# Altium PCB MainPCB.PcbDoc
Units mm, origin at the board's own origin, x right, y up, seen from the top; angles counter-clockwise.
Board outline 140 x 50 mm, 2 copper layers (Top Layer, Bottom Layer); 68 components, 119 nets, 474 pads, 62 vias.
Unrouted connection lines stored in the file: 121.
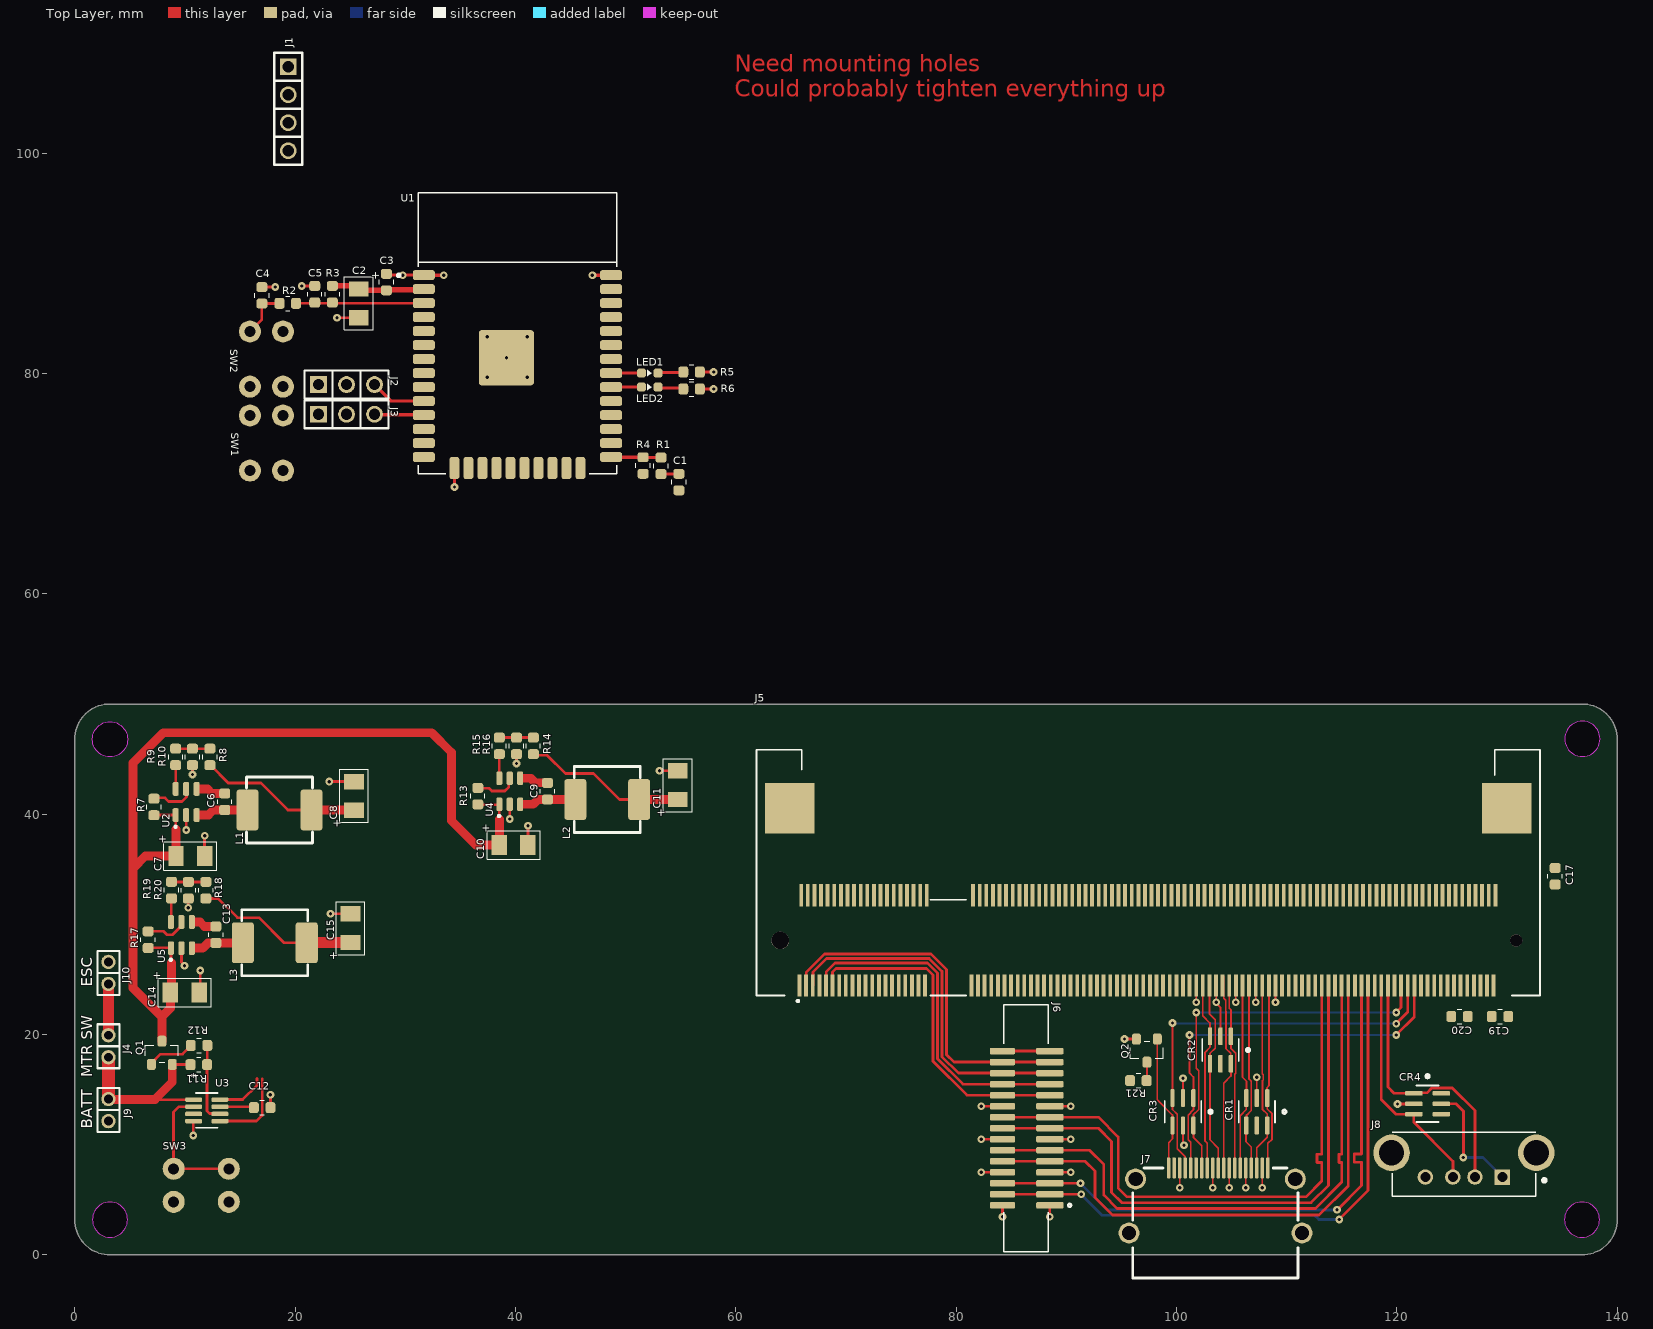
[diagram p0: Top Layer view]
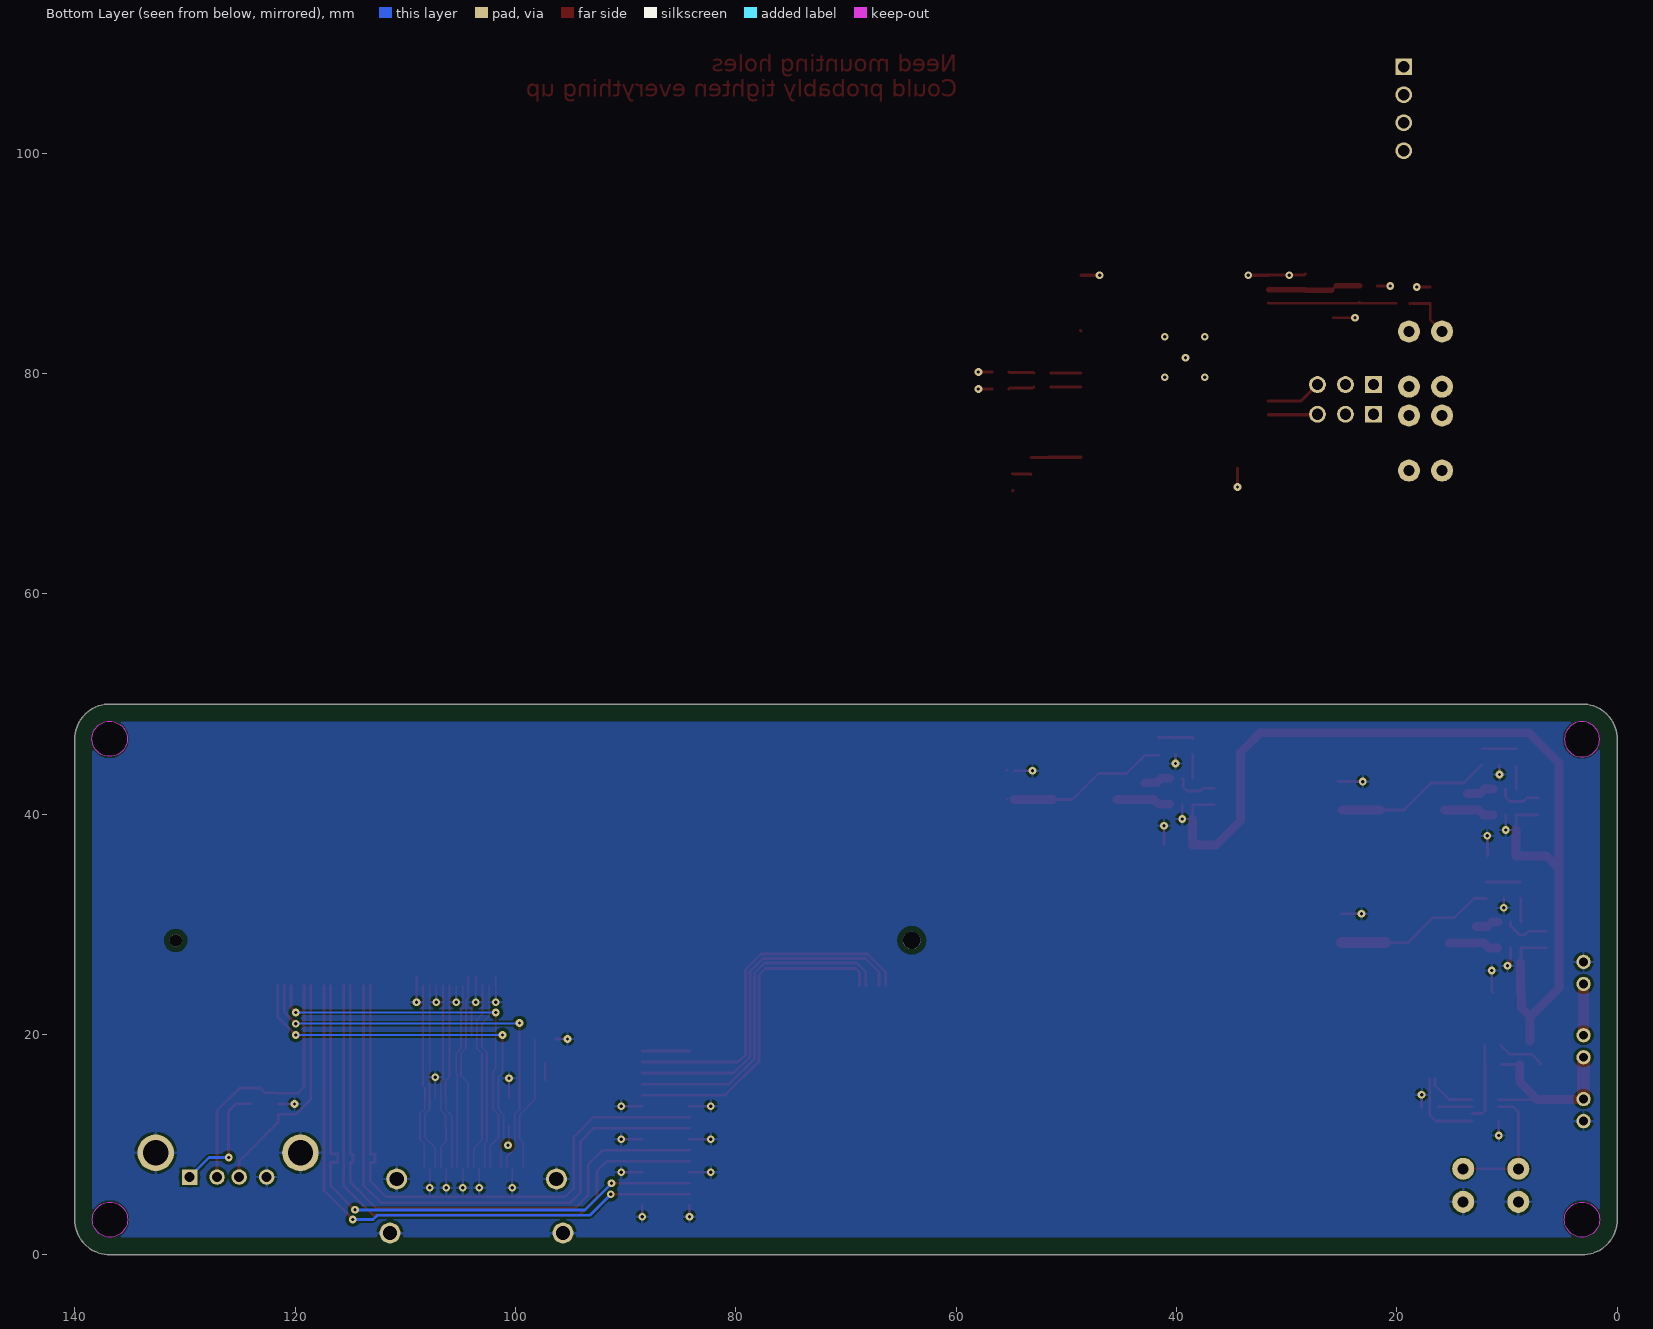
[diagram p1: Bottom Layer view, seen from below]

## Layer stack, top to bottom
Top Solder: solder mask 0.0102, Solder Resist, Dk 3.5
Top Layer: signal copper 0.0356
Dielectric 1: dielectric 0.32, FR-4, Dk 4.8
Bottom Layer: signal copper 0.0356
Bottom Solder: solder mask 0.0102, Solder Resist, Dk 3.5

## Board outline
0,3.2 0,46.8 cw(c3.2,46.8) 3.2,50 136.8,50 cw(c136.8,46.8) 140,46.8 140,3.2 cw(c136.8,3.2) 136.8,0 3.2,0 cw(c3.2,3.2)
cut-out: 135.2,3.2 ccw(c136.8,3.2) 136.8,1.6 ccw(c136.8,3.2) 138.4,3.2 ccw(c136.8,3.2) 136.8,4.8 ccw(c136.8,3.2)
cut-out: 135.241,46.842 ccw(c136.841,46.842) 136.841,45.242 ccw(c136.841,46.842) 138.441,46.842 ccw(c136.841,46.842) 136.841,48.442 ccw(c136.841,46.842)
cut-out: 3.2,45.2 cw(c3.2,46.8) 1.6,46.8 cw(c3.2,46.8) 3.2,48.4 cw(c3.2,46.8) 4.8,46.8 cw(c3.2,46.8)
cut-out: 1.6,3.2 ccw(c3.2,3.2) 3.2,1.6 ccw(c3.2,3.2) 4.8,3.2 ccw(c3.2,3.2) 3.2,4.8 ccw(c3.2,3.2)

## Design rules (kind name [scope] priority, off if disabled: settings)
Clearance [All] p1: gap=0.16 ignorepadtopadclearanceinfootprint=FALSE except(0.5: Arc-Hole Track-Hole SMDPad-Hole THPad-Hole Via-Hole Fill-Hole Poly-Hole Region-Hole Text-Hole)
DiffPairsRouting [All] p1: maxlimit=0.254 minlimit=0.254 mostfreqgap=0.254 toplayer_minwidth=0.381 toplayer_maxwidth=0.381 toplayer_prefwidth=0.381 bottomlayer_minwidth=0.381 bottomlayer_maxwidth=0.381 bottomlayer_prefwidth=0.381 maxuncoupledlength=12.7
MatchedLengths [InDifferentialPairClass('All Differential Pairs')] p1: tolerance=0.2 checknetsindiffpair=TRUE checkdiffpairvsdiffpair=FALSE checkxsignals=FALSE checkothers=FALSE
PlaneClearance [All] p1: clearance=0.5
PlaneConnect [All] p1: pad.planeconnectstyle=Relief pad.reliefexpansion=0.5 pad.reliefentries=4 pad.reliefconductorwidth=0.5 pad.reliefairgap=0.25 via.planeconnectstyle=Direct via.reliefexpansion=0.508 via.reliefentries=4 via.reliefconductorwidth=0.5 via.reliefairgap=0.254
PolygonConnect [All] p1: connectstyle=Relief reliefconductorwidth=0.254 reliefentries=4 polygonreliefangle="90 Angle" airgapwidth=0.254
RoutingVias [All] p1: holewidth=0.711 width=1.27 viastyle="Through Hole" minholewidth=0.711 minwidth=1.27 maxholewidth=0.711 maxwidth=1.27
SolderMaskExpansion [All] p1: expansion=0.102
Width [All] p1: maxlimit=0.5 minlimit=0.16 preferedwidth=0.25 minimp=50.000000 maximp=50.000000 favimp=50.000000
27 further rules are at their usual default settings.

## Classes and differential pairs
differential pair class DIFF: CAM1_C CAM1_D0 CAM1_D1
component class RaspberryPi: C17 C19 C20 CR1 CR2 CR3 CR4 J5 J6 J7 J8 Q2 R21
component class PowerSupply: C6 C7 C8 C9 C10 C11 C12 C13 C14 C15 J4 J9 J10 L1 L2 L3 Q1 R7 R8 R9 R10 R11 R12 R13 R14 R15 R16 R17 R18 R19 R20 SW3 U2 U3 U4 U5
component class ESP32: C1 C2 C3 C4 C5 J1 J2 J3 LED1 LED2 R1 R2 R3 R4 R5 R6 SW1 SW2 U1
differential pair CAM1_D1: +CAM1_D1_P -CAM1_D1_N
differential pair CAM1_D0: +CAM1_D0_P -CAM1_D0_N
differential pair CAM1_C: +CAM1_C_P -CAM1_C_N

## Components (designator, comment, footprint, x,y, rotation, side; value= is the part's Value field where it differs from the comment)
C1 "CAP" C0603 54.833,70.143 r90 top value=1nF
C2 "CAP-P" CASE-A 25.783,86.365 r270 top value=10uF
C3 "CAP" C0603 28.283,88.293 r90 top value=0.1uF
C4 "CAP" C0603 16.983,87.093 r270 top value=1nF
C5 "CAP" C0603 21.783,87.193 r90 top value=0.1uF
C6 "CAP" C0603 13.614,41.133 r270 top value=1uF
C7 "CAP-P" CASE-A 10.489,36.208 r0 top value=22uF
C8 "CAP-P" CASE-A 25.339,41.658 r90 top value=22uF
C9 "CAP" C0603 42.907,42.083 r270 top value=1uF
C10 "CAP-P" CASE-A 39.832,37.208 r0 top value=22uF
C11 "CAP-P" CASE-A 54.732,42.633 r90 top value=22uF
C12 "CAP" C0603 17.008,13.368 r0 top value=1uF
C13 "CAP" C0603 12.807,29.058 r270 top value=1uF
C14 "CAP-P" CASE-A 9.982,23.808 r0 top value=22uF
C15 "CAP-P" CASE-A 25.032,29.658 r90 top value=22uF
C17 "CAP" C0603 134.358,34.368 r90 top value=0.1uF
C19 "CAP" C0603 129.358,21.643 r0 top value=0.1uF
C20 "CAP" C0603 125.683,21.643 r180 top value=0.1uF
CR1 "HDMIULC6-4SC6" SOT23-6L 107.283,12.993 r270 top
CR2 "HDMIULC6-4SC6" SOT23-6L 103.983,18.593 r270 top
CR3 "HDMIULC6-4SC6" SOT23-6L 100.583,12.993 r270 top
CR4 "HDMIULC6-4SC6" SOT23-6L 122.783,13.718 r0 top
J1 "HDR_1x4" PINHEAD_2.54mm_1x4 19.382,107.84 r270 top
J2 "HDR_1x3" PINHEAD_2.54mm_1x3 22.13,78.993 r0 top
J3 "HDR_1x3" PINHEAD_2.54mm_1x3 22.13,76.293 r0 top
J4 "HDR_1x2" PINHEAD_2.00mm_1x2 3.058,19.943 r270 top
J5 "1473005-1" 1473005-1 97.433,28.543 r180 top
J6 "1-1734248-5" 1-1734248-5 86.3,11.5 r90 top
J7 "10029449-111RLF" 10029449-111RLF 103.533,6.893 r0 top
J8 "UJ2-AV-1-TH" UJ2-AV-1-TH 129.583,7.068 r180 top
J9 "HDR_1x2" PINHEAD_2.00mm_1x2 3.058,14.143 r270 top
J10 "HDR_1x2" PINHEAD_2.00mm_1x2 3.058,24.593 r90 top
L1 "PA4332.103NLT" PA4332.XXXNLT 18.589,40.383 r90 top value=6.8uH
L2 "PA4332.103NLT" PA4332.XXXNLT 48.332,41.333 r90 top value=6.8uH
L3 "PA4332.103NLT" PA4332.XXXNLT 18.157,28.333 r90 top value=3.3uH
LED1 "LED" 0603-LED 52.183,80.036 r0 top
LED2 "LED" 0603-LED 52.183,78.766 r0 top
Q1 "#NAME?" SOT23-3 7.908,18.343 r180 top
Q2 "#NAME?" SOT23-3 97.308,18.543 r0 top
R1 "RES" R0603 53.208,71.618 r90 top value=470
R2 "RES" R0603 19.333,86.365 r0 top value=470
R3 "RES" R0603 23.383,87.193 r270 top value=10k
R4 "RES" R0603 51.583,71.643 r90 top value=10k
R5 "RES" R0603 55.983,80.136 r0 top value=500
R6 "RES" R0603 55.983,78.593 r0 top value=500
R7 "RES" R0603 7.189,40.658 r90 top value=10k
R8 "RES" R0603 12.264,45.2 r90 top value=40.2k
R9 "RES" R0603 9.164,45.2 r90 top value=59k
R10 "RES" R0603 10.682,45.2 r270 top value=7.68k
R11 "RES" R0603 11.258,17.268 r180 top value=10k
R12 "RES" R0603 11.283,19.018 r180 top value=10k
R13 "RES" R0603 36.582,41.633 r90 top value=10k
R14 "RES" R0603 41.622,46.2 r90 top value=40.2k
R15 "RES" R0603 38.532,46.2 r90 top value=59k
R16 "RES" R0603 40.092,46.2 r270 top value=13k
R17 "RES" R0603 6.657,28.608 r90 top value=10k
R18 "RES" R0603 11.9,33.1 r90 top value=40.2k
R19 "RES" R0603 8.782,33.108 r90 top value=100k
R20 "RES" R0603 10.312,33.1 r270 top value=32.4k
R21 "RES" R0603 96.533,15.818 r0 top value=10k
SW1 "TACTILE_BUTTON" TACTILE_BUTTOn 17.4,73.686 r90 top
SW2 "TACTILE_BUTTON" TACTILE_BUTTOn 17.4,81.306 r270 top
SW3 "TACTILE_BUTTON" TACTILE_BUTTOn 11.483,6.318 r180 top
U1 "ESP32-WROOM-32D" ESP32-WROOM-32D 40.179,83.666 r0 top
U2 "AP65111AWU-7" SOT95P280X100-6N 10.114,41.108 r90 top
U3 "LTC2954CTS8-2_TR" TSOT-23_TS8-M 11.983,13.118 r0 top
U4 "AP65111AWU-7" SOT95P280X100-6N 39.482,42.083 r90 top
U5 "AP65111AWU-7" SOT95P280X100-6N 9.682,29.033 r90 top

## Footprints (in the part's own frame and the unit in brackets; to place one, negate y for a bottom-side part, rotate by r counter-clockwise, add the part's x,y. Pads: shape width x height; smd on the part's side, far side on the other; paste and mask are expansions set on the pad)
1-1734248-5 [mm]
  rrect50% 0.6x2.5 smd: 1(-7,-2.2) 2(-6,-2.2) 3(-5,-2.2) 4(-4,-2.2) 5(-3,-2.2) 6(-2,-2.2) 7(-1,-2.2) 8(0,-2.2) 9(1,-2.2) 10(2,-2.2) 11(3,-2.2) 12(4,-2.2) 13(5,-2.2) 14(6,-2.2) 15(7,-2.2)
  rrect50% 0.6x2.3 smd: 1_1(-7,2.1) 2_1(-6,2.1) 3_1(-5,2.1) 4_1(-4,2.1) 5_1(-3,2.1) 6_1(-2,2.1) 7_1(-1,2.1) 8_1(0,2.1) 9_1(1,2.1) 10_1(2,2.1) 11_1(3,2.1) 12_1(4,2.1) 13_1(5,2.1) 14_1(6,2.1) 15_1(7,2.1)
  silkscreen extent -11.2,-4.14 11.2,2
0603-LED [mm]
  rrect50% 0.8x0.8 smd: A(-0.75,0) K(0.75,0)
  silkscreen extent -0.2,-0.3 0.2,0.3, body extent -0.8,-0.4 0.8,0.4, height 0.6
1473005-1 [mm]
  rect 0.35x2 smd: 1(31.65,4.1) 2(31.5,-4.1) 3(31.05,4.1) 4(30.9,-4.1) 5(30.45,4.1) 6(30.3,-4.1) 7(29.85,4.1) 8(29.7,-4.1) 9(29.25,4.1) 10(29.1,-4.1) 11(28.65,4.1) 12(28.5,-4.1) 13(28.05,4.1) 14(27.9,-4.1) 15(27.45,4.1) 16(27.3,-4.1) 17(26.85,4.1) 18(26.7,-4.1) 19(26.25,4.1) 20(26.1,-4.1) 21(25.65,4.1) 22(25.5,-4.1) 23(25.05,4.1) 24(24.9,-4.1) 25(24.45,4.1) 26(24.3,-4.1) 27(23.85,4.1) 28(23.7,-4.1) 29(23.25,4.1) 30(23.1,-4.1) 31(22.65,4.1) 32(22.5,-4.1) 33(22.05,4.1) 34(21.9,-4.1) 35(21.45,4.1) 36(21.3,-4.1) 37(20.85,4.1) 38(20.7,-4.1) 39(20.25,4.1) 40(20.1,-4.1) 41(16.05,4.1) 42(15.9,-4.1) 43(15.45,4.1) 44(15.3,-4.1) 45(14.85,4.1) 46(14.7,-4.1) 47(14.25,4.1) 48(14.1,-4.1) 49(13.65,4.1) 50(13.5,-4.1) 51(13.05,4.1) 52(12.9,-4.1) 53(12.45,4.1) 54(12.3,-4.1) 55(11.85,4.1) 56(11.7,-4.1) 57(11.25,4.1) 58(11.1,-4.1) 59(10.65,4.1) 60(10.5,-4.1) 61(10.05,4.1) 62(9.9,-4.1) 63(9.45,4.1) 64(9.3,-4.1) 65(8.85,4.1) 66(8.7,-4.1) 67(8.25,4.1) 68(8.1,-4.1) 69(7.65,4.1) 70(7.5,-4.1) 71(7.05,4.1) 72(6.9,-4.1) 73(6.45,4.1) 74(6.3,-4.1) 75(5.85,4.1) 76(5.7,-4.1) 77(5.25,4.1) 78(5.1,-4.1) 79(4.65,4.1) 80(4.5,-4.1) 81(4.05,4.1) 82(3.9,-4.1) 83(3.45,4.1) 84(3.3,-4.1) 85(2.85,4.1) 86(2.7,-4.1) 87(2.25,4.1) 88(2.1,-4.1) 89(1.65,4.1) 90(1.5,-4.1) 91(1.05,4.1) 92(0.9,-4.1) 93(0.45,4.1) 94(0.3,-4.1) 95(-0.15,4.1) 96(-0.3,-4.1) 97(-0.75,4.1) 98(-0.9,-4.1) 99(-1.35,4.1) 100(-1.5,-4.1) 101(-1.95,4.1) 102(-2.1,-4.1) 103(-2.55,4.1) 104(-2.7,-4.1) 105(-3.15,4.1) 106(-3.3,-4.1) 107(-3.75,4.1) 108(-3.9,-4.1) 109(-4.35,4.1) 110(-4.5,-4.1) 111(-4.95,4.1) 112(-5.1,-4.1) 113(-5.55,4.1) 114(-5.7,-4.1) 115(-6.15,4.1) 116(-6.3,-4.1) 117(-6.75,4.1) 118(-6.9,-4.1) 119(-7.35,4.1) 120(-7.5,-4.1) 121(-7.95,4.1) 122(-8.1,-4.1) 123(-8.55,4.1) 124(-8.7,-4.1) 125(-9.15,4.1) 126(-9.3,-4.1) 127(-9.75,4.1) 128(-9.9,-4.1) 129(-10.35,4.1) 130(-10.5,-4.1) 131(-10.95,4.1) 132(-11.1,-4.1) 133(-11.55,4.1) 134(-11.7,-4.1) 135(-12.15,4.1) 136(-12.3,-4.1) 137(-12.75,4.1) 138(-12.9,-4.1) 139(-13.35,4.1) 140(-13.5,-4.1) 141(-13.95,4.1) 142(-14.1,-4.1) 143(-14.55,4.1) 144(-14.7,-4.1) 145(-15.15,4.1) 146(-15.3,-4.1) 147(-15.75,4.1) 148(-15.9,-4.1) 149(-16.35,4.1) 150(-16.5,-4.1) 151(-16.95,4.1) 152(-17.1,-4.1) 153(-17.55,4.1) 154(-17.7,-4.1) 155(-18.15,4.1) 156(-18.3,-4.1) 157(-18.75,4.1) 158(-18.9,-4.1) 159(-19.35,4.1) 160(-19.5,-4.1) 161(-19.95,4.1) 162(-20.1,-4.1) 163(-20.55,4.1) 164(-20.7,-4.1) 165(-21.15,4.1) 166(-21.3,-4.1) 167(-21.75,4.1) 168(-21.9,-4.1) 169(-22.35,4.1) 170(-22.5,-4.1) 171(-22.95,4.1) 172(-23.1,-4.1) 173(-23.55,4.1) 174(-23.7,-4.1) 175(-24.15,4.1) 176(-24.3,-4.1) 177(-24.75,4.1) 178(-24.9,-4.1) 179(-25.35,4.1) 180(-25.5,-4.1) 181(-25.95,4.1) 182(-26.1,-4.1) 183(-26.55,4.1) 184(-26.7,-4.1) 185(-27.15,4.1) 186(-27.3,-4.1) 187(-27.75,4.1) 188(-27.9,-4.1) 189(-28.35,4.1) 190(-28.5,-4.1) 191(-28.95,4.1) 192(-29.1,-4.1) 193(-29.55,4.1) 194(-29.7,-4.1) 195(-30.15,4.1) 196(-30.3,-4.1) 197(-30.75,4.1) 198(-30.9,-4.1) 199(-31.35,4.1) 200(-31.5,-4.1)
  rect 4.5x4.6 smd: 201(-32.55,-12) 202(32.55,-12)
  round 1.1 hole 1.1 unplated: None(-33.4,0)
  round 1.6 hole 1.6 unplated: None(33.4,0)
  silkscreen extent -35.55,-17.3 35.55,5.6, body extent -35.75,-21.05 35.75,5, height 5.25
10029449-111RLF [mm] "CONN RCPT 1.4 HDMI 19POS SMD R/A"
  round 1.9 hole 1.3: 0(-7.85,-4.9) 0(-7.25,0) 0(7.25,0) 0(7.85,-4.9)
  rrect50% 0.3x1.9 smd: 1(4.75,1) 2(4.25,1) 3(3.75,1) 4(3.25,1) 5(2.75,1) 6(2.25,1) 7(1.75,1) 8(1.25,1) 9(0.75,1) 10(0.25,1) 11(-0.25,1) 12(-0.75,1) 13(-1.25,1) 14(-1.75,1) 15(-2.25,1) 16(-2.75,1) 17(-3.25,1) 18(-3.75,1) 19(-4.25,1)
  silkscreen extent -7.5,-9 7.5,1
C0603 [mm]
  rrect50% 0.9x1 smd: 1(-0.75,0) 2(0.75,0)
  silkscreen extent -0.2,-0.65 0.2,0.65, body extent -0.8,-0.4 0.8,0.41, height 0.87
CASE-A [mm] "Vishay Case A"
  rect 1.4x1.8 smd: 1(-1.3,0) 2(1.3,0)
  silkscreen extent -2.4,-1.3 2.4,1.3, body extent -1.7,-0.84 1.7,0.84, height 1.7
ESP32-WROOM-32D [mm]
  rrect50% 2x0.9 smd: 1(-8.5,5.26) 2(-8.5,3.99) 3(-8.5,2.72) 4(-8.5,1.45) 5(-8.5,0.18) 6(-8.5,-1.09) 7(-8.5,-2.36) 8(-8.5,-3.63) 9(-8.5,-4.9) 10(-8.5,-6.17) 11(-8.5,-7.44) 12(-8.5,-8.71) 13(-8.5,-9.98) 14(-8.5,-11.25) 25(8.5,-11.25) 26(8.5,-9.98) 27(8.5,-8.71) 28(8.5,-7.44) 29(8.5,-6.17) 30(8.5,-4.9) 31(8.5,-3.63) 32(8.5,-2.36) 33(8.5,-1.09) 34(8.5,0.18) 35(8.5,1.45) 36(8.5,2.72) 37(8.5,3.99) 38(8.5,5.26)
  rrect50% 0.9x2 smd: 15(-5.715,-12.25) 16(-4.445,-12.25) 17(-3.175,-12.25) 18(-1.905,-12.25) 19(-0.635,-12.25) 20(0.635,-12.25) 21(1.905,-12.25) 22(3.175,-12.25) 23(4.445,-12.25) 24(5.715,-12.25)
  rrect10% 5x5 smd: 39(-1,-2.24)
  silkscreen extent -10.88,-12.75 9,12.75
PA4332.XXXNLT [mm] "Pulse - Fixed Inductor - 4.2x4.2"
  rrect25% 3.7x2 smd: 1(0,2.9) 2(0,-2.9)
  silkscreen extent -3,-3 3,3, body extent -3,-3 3,3, height 2
PINHEAD_2.00mm_1x2 [mm]
  round 1.3 hole 0.8: 1(0,0) 2(2,0)
  silkscreen extent -1,-1 3,1, body extent -1,-1 3,1, height 5.64
PINHEAD_2.54mm_1x3 [mil]
  rect 60x60 hole 40: 1(0,0)
  round 60 hole 40: 2(100,0) 3(200,0)
  silkscreen extent -50,-50 250,50, body extent -53,-53 253,53, height 340
PINHEAD_2.54mm_1x4 [mil]
  rect 60x60 hole 40: 1(0,0)
  round 60 hole 40: 2(100,0) 3(200,0) 4(300,0)
  silkscreen extent -50,-50 350,50, body extent -53,-53 353,53, height 340
R0603 [mm]
  rrect50% 0.9x1 smd: 1(-0.75,0) 2(0.75,0)
  silkscreen extent -0.2,-0.65 0.2,0.65, body extent -0.8,-0.4 0.8,0.4, height 0.45
SOT23-3 [mm] "SOT23-3"
  rrect50% 0.8x1 smd: 1(0.95,1.05) 2(-0.95,1.05) 3(0,-1.05)
  silkscreen extent -1.5,-0.68 1.5,0.85, body extent -1.45,-1.4 1.45,1.4, height 1.3
SOT23-6L [mm]
  rrect50% 1.61x0.4 smd: 1(-1.244,0.95) 2(-1.244,0) 3(-1.244,-0.95) 4(1.244,-0.95) 5(1.244,0) 6(1.244,0.95)
  silkscreen extent -1,-1.65 1,2.65
SOT95P280X100-6N [mm]
  rrect50% 1.24x0.55 smd: 1(-1.185,0.95) 2(-1.185,0) 3(-1.185,-0.95) 4(1.185,-0.95) 5(1.185,0) 6(1.185,0.95)
  silkscreen extent -2.35,0.86 -2.15,1.06, body extent -0.85,-1.5 0.85,1.5, height 1
TACTILE_BUTTOn [mm]
  round 2 hole 1: 1(-2.5,1.5) 1(2.5,1.5) 2(-2.5,-1.5) 2(2.5,-1.5)
  body extent -2.25,-2.25 2.25,2.25, height 3.5
TSOT-23_TS8-M [mil]
  rrect50% 60x16 smd: 1(-47,38.39) 2(-47,12.8) 3(-47,-12.8) 4(-47,-38.39) 5(47,-38.39) 6(47,-12.8) 7(47,12.8) 8(47,38.39)
  silkscreen extent -40,-62 40,62
UJ2-AV-1-TH [mm]
  rect 1.408x1.408 hole 0.9: 1(0,0)
  round 1.408 hole 0.9: 2(2.5,0) 3(4.5,0) 4(7,0)
  round 3.316 hole 2.3: SH1(-3.07,-2.2) SH2(10.07,-2.2)
  silkscreen extent -3.95,-4.05 10,1.75

## Part data
C1 C2 C4: "=Description", Voltage==Voltage
C3 C5 C6 C7 C8 C9 C10 C11 C12 C13 C14 C15 C17 C19 C20: "=Description", Voltage=25V
J1 J2 J3 J4 J9 J10 R1 R2 R3 R4 R5 R6 R7 R8 R9 R10 R11 R12 R13 R14 R15 R16 R17 R18 R19 R20 R21: "=Description"
J5: "SEMI HARD TRAY DDR SOCKET 200P", Package=None, Centerline_Pitch=".6 mm[.024 in]", Digi-Key_Part_Number=A99605-ND, Digi-Key_Purchase_URL=https://www.digikey.com.au/product-detail/en/te-connectivity-amp-connectors/1473005-1/A99605-ND/1890691?utm_source=snapeda&utm_medium=aggregator&utm_campaign=symbol, MF="TE Connectivity", MP=1473005-1, Number_of_Positions=200, Product_Type=Socket, SnapEDA_Link=https://www.snapeda.com/parts/1473005-1/TE%20Connectivity%20AMP%20Connectors/view-part/?ref=snap, TE_purchase_URL=https://www.te.com/usa-en/product-1473005-1.html?te_bu=Cor&te_type=disp&te_campaign=seda_glo_cor-seda-global-disp-prtnr-fy19-seda-model-bom-cta_sma-317_1&elqCampaignId=32493
J6: "Conn FPC Connector SKT 15 POS 1mm Solder ST SMD T/R", Package=None, Digi-Key_Part_Number=A101418CT-ND, Digi-Key_Purchase_URL=https://www.digikey.com.au/product-detail/en/te-connectivity-amp-connectors/1-1734248-5/A101418CT-ND/2567554?utm_source=snapeda&utm_medium=aggregator&utm_campaign=symbol, EU_RoHS_Compliance=Compliant, MF="TE Connectivity", MP=1-1734248-5, SnapEDA_Link=https://www.snapeda.com/parts/1-1734248-5/TE%20Connectivity%20AMP%20Connectors/view-part/?ref=snap, TE_purchase_URL=https://www.te.com/usa-en/product-1-1734248-5.html?te_bu=Cor&te_type=disp&te_campaign=seda_glo_cor-seda-global-disp-prtnr-fy19-seda-model-bom-cta_sma-317_1&elqCampaignId=32493
J7: "CONN RCPT 1.4 HDMI 19POS R/A"
J8: "Standard A Type 4 Pin Vertical 3 µin Plating Through Hole USB Jack 2.0", Package=None, CUI_purchase_URL=https://www.cui.com/product/interconnect/usb-connectors/type-a/uj2-av-th-series?utm_source=snapeda.com&utm_medium=referral&utm_campaign=snapedaBOM, Digi-Key_Part_Number=102-3995-ND, Digi-Key_Purchase_URL=https://www.digikey.com.au/product-detail/en/cui-inc/UJ2-AV-1-TH/102-3995-ND/6187910?utm_source=snapeda&utm_medium=aggregator&utm_campaign=symbol, MF="CUI Inc.", MP=UJ2-AV-1-TH, SnapEDA_Link=https://www.snapeda.com/parts/UJ2-AV-1-TH/CUI%20Inc./view-part/?ref=snap
L1 L2: library part IND, "=Description", Part_Number=PA4332.682NLT
L3: library part IND, "FIXED IND 10UH 2A 216 MOHM SMD", Part_Number=PA4332.332NLT
Q1: library part MOSFET_P_GSD, "=Description"
Q2: library part MOSFET_N_GSD, "=Description"
U1: "IC: SoC; GPIO, I2C, I2S, IR, SD, SDIO, SPI, UART; 2.7÷3.6VDC; 20dBm", Package="Module Espressif Systems", Availability=Unavailable, MF="Espressif Systems", MP=ESP32-WROOM-32D, Price=None, SnapEDA_Link=https://www.snapeda.com/parts/ESP32-WROOM-32D/Espressif%20Systems/view-part/?ref=snap
U2 U4 U5: "Dcdc Conv Hv Buck Tsot26 t&r 3k", Package="TSOT-23-6 Diodes Inc.", Digi-Key_Part_Number=AP65111AWU-7DICT-ND, Digi-Key_Purchase_URL=https://www.digikey.com.au/product-detail/en/diodes-incorporated/AP65111AWU-7/AP65111AWU-7DICT-ND/7652826?utm_source=snapeda&utm_medium=aggregator&utm_campaign=symbol, MF="Diodes Inc.", MP=AP65111AWU-7, SnapEDA_Link=https://www.snapeda.com/parts/AP65111AWU-7/Diodes%20Inc./view-part/?ref=snap
U3: Manufacturer_Part_Number=LTC2954CTS8-2#TRMPBF, Built_By=EMA_UL_Team, Vendor="Linear Technology"
CR1 CR2 CR3 CR4: Built_By=EMA_UL_Team, C="Copyright (C) 2015 Accelerated Designs. All rights reserved", Manufacturer_Part_Number=HDMIULC6-4SC6, Vendor=STMicroelectronics

## Via types
v1: diameter 0.7, hole 0.3, Top Layer to Bottom Layer, tented both sides, 62 vias

## Nets (pads, with @x,y where several pads share a name; then routed paths per layer and width w, separated by ;. In a path a pad name is that pad's centre, name@x,y a point inside that pad or via, vN(x,y) a via of type N, cw(c..) or ccw(c..) an arc to the next point about the centre after c; other vN are vias at no path point)
CAM1_C_N: J5.149 J6.8 J6.8_1 | length 53.9
  Top Layer w0.25: J6.8_1 J6.8 92.9,11.5 94.1,10.3 94.1,5.669 95.026,4.743 112.208,4.743 113.783,6.318 J5.149
CAM1_C_P: J5.147 J6.9 J6.9_1 | length 53.9
  Top Layer w0.25: J6.9_1 J6.9 92.9,12.5 94.7,10.7 94.7,6.076 95.508,5.268 111.733,5.268 113.183,6.718 113.183,8 113.183,8.379 112.754,8.379 112.754,9.137 113.183,9.137 113.183,9.793 J5.147
CAM1_D0_N: J5.161 J6.2 J6.2_1 | length 54
  Top Layer w0.16: J6.2 J6.2@88.625,5.375
  Top Layer w0.25: J6.2_1 J6.2 v1(91.35,5.5) ; v1(114.758,3.218) 117.383,5.843 J5.161
  Bottom Layer w0.25: v1(91.35,5.5) 93.257,3.593 112.54,3.593 112.915,3.218 v1(114.758,3.218)
CAM1_D0_P: J5.159 J6.3 J6.3_1 | length 54
  Top Layer w0.25: J6.3_1 J6.3 v1(91.275,6.5) ; v1(114.565,4.094) 114.584,4.094 116.783,6.293 116.783,7.2 116.783,8.405 116.124,8.405 116.124,9.163 116.783,9.163 116.783,9.921 116.783,10.3 J5.159
  Bottom Layer w0.25: v1(91.275,6.5) 93.707,4.068 114.558,4.068 114.565,4.075 v1(114.565,4.094)
CAM1_D1_N: J5.155 J6.5 J6.5_1 | length 54.1
  Top Layer w0.25: J6.5_1 J6.5 91.7,8.5 92.6,7.6 92.6,5.201 94.183,3.618 112.933,3.618 115.583,6.268 J5.155
CAM1_D1_P: J5.153 J6.6 J6.6_1 | length 54.1
  Top Layer w0.16: J6.6 J6.6@88.625,9.375
  Top Layer w0.25: J6.6_1 J6.6 92.1,9.5 93.4,8.2 93.4,5.426 94.608,4.218 112.608,4.218 114.983,6.593 114.983,8 114.983,8.379 114.745,8.379 114.745,9.137 114.983,9.137 114.983,9.918 J5.153
CAM1_DN2: J5.143
CAM1_DN3: J5.137
CAM1_DP2: J5.141
CAM1_DP3: J5.135
CAM_GPIO0: J5.11 J6.11 J6.11_1 | length 30.4
  Top Layer w0.25: J5.11 68.783,25.683 69.1,26 77.3,26 77.9,25.4 77.9,17.576 80.976,14.5 J6.11_1 J6.11
CAM_GPIO1: J5.9 J6.12 J6.12_1 | length 31
  Top Layer w0.25: J5.9 68.2,24.46 68.2,25.683 69.017,26.5 77.38,26.5 78.31,25.57 78.31,17.8 80.61,15.5 J6.12_1 J6.12
ESP_BOOT: R1.2 R4.2 U1.25 | length 4.5
  Top Layer w0.25: R4.2 51.596,72.381 53.196,72.381 R1.2
  Top Layer w0.254: U1.25 U1.25@48.702,72.393
  Top Layer w0.3: U1.25@48.702,72.393 R4.2
ESP_EN: C5.1 R2.2 R3.2 U1.3 | length 11.6
  Top Layer w0.254: R2.2 21.783,86.365 23.383,86.365 23.405,86.365 23.415,86.375 31.647,86.375 31.658,86.365 U1.3 ; R3.2 R3.2@23.405,86.465
GND: C1.1 C2.2 C3.2 C4.1 C5.2 C7.2 C8.2 C10.2 C11.2 C12.2 C14.2 C15.2 C17.2 C19.2 C20.2 CR1.2 CR2.2 CR3.2 CR4.2 J1.4 J2.1 J3.1 J5.1 J5.7 J5.8 J5.13 J5.14 J5.19 J5.20 J5.25 J5.26 J5.31 J5.32 J5.37 J5.38 J5.43 J5.44 J5.49 J5.50 J5.55 J5.56 J5.61 J5.62 J5.67 J5.68 J5.73 J5.74 J5.79 J5.80 J5.85 J5.86 J5.91 J5.92 J5.97 J5.98 J5.103 J5.104 J5.109 J5.110 J5.115 J5.116 J5.121 J5.122 J5.127 J5.133 J5.134 J5.139 J5.140 J5.145 J5.146 J5.151 J5.152 J5.157 J5.163 J5.164 J5.168 J5.169 J5.170 J5.181 J5.182 J5.187 J5.188 J5.195 J5.196 J5.201 J5.202 J6.1 J6.1_1 J6.4 J6.4_1 J6.7 J6.7_1 J6.10 J6.10_1 J7.0 J7.2 J7.5 J7.8 J7.11 J7.17 J8.4 J8.SH1 J8.SH2 J9.2 J10.2 Q2.2 R5.2 R6.2 R10.2 R16.2 R20.2 SW1.1 SW2.1 SW3.1 U1.1 U1.15 U1.38 U1.39 U2.2 U3.4 U4.2 U5.2 | length 78.6
  Top Layer w0.16: v1(100.283,6.093) J7.17 ; CR3.2 v1(100.583,16.043) ; v1(101.783,22.943) J5.109 J5.109@101.783,25.343 ; v1(103.283,6.093) J7.11 ; J5.115@103.608,25.318 103.608,22.859 103.983,22.484 CR2.2 ; v1(104.783,6.093) J7.8 ; v1(105.383,22.943) J5.121 ; v1(106.283,6.093) J7.5 ; v1(107.183,22.943) J5.127 ; CR1.2 v1(107.283,16.118) ; v1(107.783,6.093) J7.2 ; v1(108.983,22.943) J5.133 J5.133@108.983,25.343
  Top Layer w0.25: U5.2 9.682,26.53 9.957,26.255 v1(9.957,26.233) ; v1(10.114,38.558) U2.2 ; v1(10.3,31.5) 10.306,31.506 10.306,32.344 R20.2 ; v1(10.682,43.6) R10.2 ; v1(10.764,10.843) 10.764,12.118 U3.4 ; C14.2 11.382,23.908 v1(11.382,25.808) ; C7.2 v1(11.789,38.033) ; C4.1 v1(18.208,87.843) ; C12.2 v1(17.758,14.543) ; v1(20.608,87.943) C5.2 ; v1(23.089,42.958) C8.2 ; v1(23.207,30.958) C15.2 ; v1(23.808,85.068) 25.78,85.068 C2.2 ; v1(34.464,69.693) U1.15 ; v1(39.482,39.558) U4.2 ; v1(40.092,44.6) R16.2 ; C10.2 v1(41.132,38.958) ; v1(53.082,43.933) C11.2 ; v1(82.275,7.5) J6.4_1 ; v1(82.275,10.5) J6.7_1 ; v1(82.275,13.5) J6.10_1 ; v1(84.2,3.475) J6.1_1 ; v1(88.5,3.475) J6.1 ; J6.4 v1(90.4,7.5) ; J6.7 v1(90.4,10.5) ; J6.10 v1(90.4,13.5) ; v1(95.283,19.593) Q2.2 ; v1(120.058,13.693) 120.071,13.706 121.527,13.706 CR4.2
  Top Layer w0.254: C3.2 28.4,88.926 v1(29.783,88.926) U1.1 ; C1.1 C1.1@54.883,69.343
  Top Layer w0.3: U1.1 v1(33.483,88.926) ; v1(46.983,88.926) U1.38 ; R6.2 v1(57.983,78.593) ; R5.2 v1(57.983,80.136)
  other v1: 103.608,22.943 37.433,79.668 41.058,79.668 39.179,81.426 37.433,83.343 41.058,83.343
GPIO0: J5.3 J6.14 J6.14_1 | length 32.6
  Top Layer w0.25: J5.3 66.4,24.46 66.4,25.663 68.057,27.32 77.719,27.32 79.13,25.909 79.13,18.17 79.8,17.5 J6.14_1 J6.14
GPIO1: J5.5 J6.13 J6.13_1 | length 32.1
  Top Layer w0.25: J5.5 67,24.46 67,25.683 68.227,26.91 77.55,26.91 78.72,25.74 78.72,17.98 80.2,16.5 J6.13_1 J6.13
GPIO4: J5.15
GPIO5: J5.17
GPIO6: J5.21
GPIO7: J5.23
GPIO8: J5.27
GPIO9: J5.29
GPIO10: J5.33
GPIO11: J5.35
GPIO12: J5.45
GPIO13: J5.47
GPIO14: J5.51 U1.27
GPIO15: J5.53 U1.28
GPIO16: J5.57
GPIO17: J5.59
GPIO18: J5.63
GPIO19: J5.65
GPIO20: J5.69
GPIO21: J5.71
GPIO22: J5.75
GPIO23: J5.77
GPIO24: J5.81
GPIO25: J5.83
GPIO26: J5.87
GPIO27: J5.89
GPIO28: J5.28
GPIO29: J5.30
GPIO30: J5.34
GPIO31: J5.36
GPIO32: J5.46
GPIO33: J5.48
GPIO34: J5.52
GPIO35: J5.54
GPIO36: J5.58
GPIO37: J5.60
GPIO38: J5.64
GPIO39: J5.66
GPIO40: J5.70
GPIO41: J5.72
GPIO42: J5.76
GPIO43: J5.78
GPIO45: J5.82
GPIO46: J5.84
HDMI_CEC: CR3.6 J5.171 J7.13 | length 35.5
  Top Layer w0.16: v1(101.783,22.002) 101.783,16.943 102.018,16.708 102.018,13.201 101.533,12.716 CR3.6 101.533,10.668 102.283,9.918 J7.13
  Top Layer w0.25: v1(119.933,22.002) 120.383,22.452 J5.171
  Bottom Layer w0.16: v1(101.783,22.002) v1(119.933,22.002)
  Bottom Layer w0.25: v1@119.916,22.018 v1(119.933,22.002)
HDMI_CLK_N: CR2.3 J5.111 J7.12 | length 17.1
  Top Layer w0.16: J5.111 102.383,21.693 103.033,21.043 CR2.3 103.033,18.843 102.593,18.403 102.593,10.343 102.783,10.153 J7.12
HDMI_CLK_P: CR2.4 J5.113 J7.10 | length 17.3
  Top Layer w0.16: J5.113 102.983,21.884 103.508,21.359 103.508,18.768 103.04,18.301 103.04,17.357 CR2.4 103.033,10.443 103.783,9.693 J7.10
HDMI_D0_N: CR2.6 J5.117 J7.9 | length 18
  Top Layer w0.16: J5.117@104.198,25.328 104.278,25.248 104.278,23.306 104.463,23.121 104.463,22.113 104.493,22.083 104.493,18.708 104.91,18.292 104.91,17.373 CR2.6 104.933,16.243 104.283,15.593 J7.9
HDMI_D0_P: CR2.1 J5.119 J7.7 | length 16.8
  Top Layer w0.16: J5.119 104.783,22.393 104.942,22.235 104.942,22.102 104.933,22.093 CR2.1 104.933,18.743 105.373,18.303 105.373,16.504 105.283,16.414 J7.7
HDMI_D1_N: CR1.3 J5.123 J7.6 | length 16.9
  Top Layer w0.16: J7.6 105.783,12.643 106.333,13.193 CR1.3 106.357,14.261 106.357,15.743 105.983,16.116 J5.123
HDMI_D1_P: CR1.4 J5.125 J7.4 | length 17
  Top Layer w0.16: J5.125 106.583,15.969 106.773,15.779 106.773,13.111 106.355,12.693 106.355,11.771 CR1.4 106.308,11.724 106.308,10.268 106.783,9.793 J7.4
HDMI_D2_N: CR1.6 J5.129 J7.3 | length 17.3
  Top Layer w0.16: J7.3 107.283,9.743 108.233,10.693 CR1.6 108.233,12.791 107.793,13.231 107.793,15.794 107.873,15.874 107.873,16.363 107.783,16.453 J5.129 ; J5.129@107.873,25.253 J5.129@107.873,25.343
HDMI_D2_P: CR1.1 J5.131 J7.1 | length 17
  Top Layer w0.16: CR1.1@108.208,14.262 108.208,15.168 108.383,15.343 J5.131 ; CR1.1 108.233,13.243 108.673,12.803 108.673,10.508 108.283,10.118 J7.1
  Top Layer w0.25: CR1.1@108.208,14.262 CR1.1
HDMI_HPD: CR3.4 J7.19 Q2.1 | length 12.4
  Top Layer w0.16: Q2.1 98.258,14.068 99.633,12.693 CR3.4 99.633,10.543 99.283,10.193 J7.19
HDMI_HPD_1V8: J5.88 Q2.3 R21.2 | length 1.7
  Top Layer w0.16: R21.2 97.308,15.843 Q2.3
HDMI_SCL: CR3.1 J5.175 J7.15 | length 36.4
  Top Layer w0.16: v1@101.183,19.943 101.183,16.493 101.533,16.143 CR3.1 101.533,13.168 101.058,12.693 101.058,10.453 101.283,10.228 J7.15
  Top Layer w0.25: v1(119.933,19.968) 121.583,21.618 J5.175
  Bottom Layer w0.16: v1(101.183,19.968) v1(119.933,19.968)
HDMI_SDA: CR3.3 J5.173 J7.16 | length 37.8
  Top Layer w0.16: v1@99.633,20.985 CR3.3 99.633,13.193 100.073,12.753 100.073,9.628 100.783,8.918 J7.16
  Top Layer w0.25: v1(119.933,20.985) 120.983,22.035 J5.173
  Bottom Layer w0.16: v1@99.662,21.014 v1@119.904,21.014
  Bottom Layer w0.25: v1(99.633,21.043) v1@99.662,21.014 ; v1@119.904,21.014 v1(119.933,20.985)
LED_0: LED2.A U1.30 | length 2.8
  Top Layer w0.3: U1.30 LED2.A
LED_1: LED1.A U1.31 | length 2.8
  Top Layer w0.3: U1.31 LED1.A
NetC1_2: C1.2 R1.1 SW1.2 | length 1.7
  Top Layer w0.25: R1.1 53.221,70.881 54.821,70.881 C1.2 C1.2@54.883,70.893
  Top Layer w0.254: R1.1 R1.1@53.233,70.843
NetC4_2: C4.2 R2.1 SW2.2 | length 4.7
  Top Layer w0.25: SW2.2@15.9,83.806 16.983,84.889 C4.2
  Top Layer w0.254: SW2.2@15.875,78.781 SW2.2@15.9,78.806 ; C4.2 C4.2@16.994,86.354 ; R2.1@18.572,86.354 R2.1 ; R2.1@18.808,86.318 R2.1@18.833,86.343
  Top Layer w0.3: C4.2@16.994,86.354 R2.1@18.572,86.354
NetC6_1: C6.1 U2.4 | length 2.5
  Top Layer w0.8: U2.4@11.289,42.293 12.054,42.293 12.464,41.883 C6.1
NetC6_2: C6.2 L1.1 U2.3 | length 4.6
  Top Layer w0.8: U2.3@11.289,39.923 12.129,39.923 12.589,40.383 C6.2 L1.1
NetC9_1: C9.1 U4.4 | length 2.5
  Top Layer w0.25: C9.1@42.882,42.858 C9.1
  Top Layer w0.8: U4.4@40.632,43.268 41.397,43.268 41.807,42.858 C9.1@42.882,42.858
NetC9_2: C9.2 L2.1 U4.3 | length 5
  Top Layer w0.8: U4.3@40.632,40.898 41.622,40.898 42.057,41.333 C9.2 L2.1
NetC12_1: C12.1 U3.7 | length 3.1
  Top Layer w0.25: U3.7 C12.1@16.258,13.443
NetC13_1: C13.1 U5.4 | length 2.1
  Top Layer w0.8: U5.4@10.832,30.218 11.372,30.218 11.782,29.808 C13.1
NetC13_2: C13.2 L3.1 U5.3 | length 4.6
  Top Layer w0.25: C13.2@12.782,28.333 C13.2 ; L3.1@15.232,28.308 L3.1
  Top Layer w0.8: U5.3@10.882,27.848 11.622,27.848 12.107,28.333 C13.2@12.782,28.333 ; C13.2 L3.1@15.232,28.308
NetJ4_1: J4.1 J10.1 | length 4.7
  Top Layer w1: J4.1 J10.1
NetLED1_K: LED1.K R5.1 | length 2.3
  Top Layer w0.254: LED1.K 52.983,80.086 55.183,80.086 R5.1
NetLED2_K: LED2.K R6.1 | length 2.4
  Top Layer w0.254: LED2.K 53.02,78.68 55.147,78.68 R6.1
NetQ1_1: Q1.1 R12.2 | length 4.4
  Top Layer w0.25: Q1.1 6.958,17.393 7.783,18.218 9.783,18.218 10.533,18.968 R12.2
NetR7_2: R7.2 U2.5 | length 4
  Top Layer w0.25: R7.2@7.189,41.483 8.189,41.483 8.514,41.158 9.739,41.158 10.139,41.558 10.139,42.268 U2.5
NetR8_2: R8.2 R9.2 R10.1 | length 3.1
  Top Layer w0.25: R9.2 R10.1 R8.2
NetR9_1: R9.1 U2.6 | length 2.1
  Top Layer w0.25: U2.6 R9.1@9.164,44.358
NetR11_1: R11.1 R12.1 U3.6 | length 7.2
  Top Layer w0.25: R12.1 12.021,19.006 12.021,17.281 R11.1 12.008,13.068 12.233,12.843 13.127,12.843 U3.6
NetR13_2: R13.2 U4.5 | length 3.9
  Top Layer w0.25: R13.2@36.582,42.358 37.607,42.358 37.857,42.108 39.032,42.108 39.397,42.473 39.397,43.183 U4.5
NetR14_2: R14.2 R15.2 R16.1 | length 3.4
  Top Layer w0.25: R15.2@38.532,46.833 R15.2@38.649,46.95 ; R15.2 R15.2@38.649,46.95 ; R16.1@40.1,46.85 R16.1@40,46.95 ; R14.2 R16.1 R16.1@40,46.95 ; R15.2@38.649,46.95 R16.1@40,46.95
NetR15_1: R15.1 U4.6 | length 2.2
  Top Layer w0.25: U4.6 R15.1
NetR17_2: R17.2 U5.5 | length 4.1
  Top Layer w0.25: R17.2@6.507,29.383 6.457,29.383 8.032,29.383 8.357,29.058 8.867,29.058 9.682,29.873 U5.5
NetR18_2: R18.2 R19.2 R20.1 | length 3.1
  Top Layer w0.25: R19.2 8.786,33.854 10.308,33.854 R20.1 R18.2 R18.2@11.913,33.863
NetR19_1: R19.1 U5.6 | length 2.2
  Top Layer w0.25: U5.6 8.757,30.243 8.757,32.333 R19.1
NetSW3_2: SW3.2 U3.2 | length 12.2
  Top Layer w0.25: SW3.2@8.958,7.818 8.958,12.968 9.433,13.443 U3.2 ; SW3.2@8.983,7.818 SW3.2@13.983,7.818
PROG_RX: J1.3 U1.34 | length 0.1
  Top Layer w0.25: U1.34 U1.34@48.748,83.915
PROG_TX: J1.2 U1.35
PWR_INT: U1.16 U3.5 | length 7.4
  Top Layer w0.25: U3.5 16.508,12.143 17.008,12.643 17.008,15.993
PWR_KILL: U1.13 U3.8 | length 4.5
  Top Layer w0.25: U3.8 13.183,14.099 15.239,14.099 16.533,15.393 16.533,16.018
RPI_RESET: J5.177
SDX_CLK: J5.10
SDX_CMD: J5.12
SDX_D0: J5.16
SDX_D1: J5.18
SDX_D2: J5.22
SDX_D3: J5.24
SERVO_ESC: J3.3 U1.11 | length 4.5
  Top Layer w0.254: J3.3 J3.3@27.244,76.26 ; U1.11@31.646,76.26 U1.11
  Top Layer w0.3: J3.3@27.244,76.26 U1.11@31.646,76.26
SERVO_STEER: J2.3 U1.10 | length 5.1
  Top Layer w0.3: J2.3 28.707,77.496 U1.10
SYS_DC_IN: J1.1
SYS_IN: J4.2 J9.1 Q1.2 R11.2 U3.1 | length 17
  Top Layer w0.25: J9.1 J9.1@3.083,14.118 ; 7.283,14.118 7.308,14.093 U3.1 ; Q1.2 8.871,17.281 10.496,17.281 R11.2
  Top Layer w0.8: J9.1@3.083,14.118 7.283,14.118 8.858,15.693 Q1.2
  Top Layer w1.2: J9.1 J4.2
SYS_SW: C7.1 C10.1 C14.1 Q1.3 R7.1 R13.1 R17.1 U2.1 U4.1 U5.1 | length 93.1
  Top Layer w0.25: R17.1@6.457,27.883 6.507,27.883 8.697,27.883 U5.1 8.732,26.508 ; R7.1@7.189,39.923 U2.1 9.164,38.658 9.189,38.633 ; C14.1@8.674,23.8 C14.1 ; R13.1@36.582,40.858 38.492,40.858 U4.1 38.532,39.533 38.557,39.508
  Top Layer w0.8: Q1.3 7.908,21.608 ; C14.1 8.682,22.382 7.908,21.608 ; C14.1@8.782,23.808 8.782,26.508 ; 9.189,38.633 C7.1 6.408,36.208 5.3,35.1 ; C10.1 36.392,37.208 34.2,39.4 34.2,45.6 32.4,47.4 8.031,47.4 5.3,44.669 5.3,35.1 ; C10.1@38.557,37.208 38.557,39.508 ; 5.3,35.1 5.3,24.216 7.908,21.608
USB_DN: CR4.1 J5.167 J8.2 | length 24.4
  Top Layer w0.25: J5.167 119.183,15.243 119.758,14.668 CR4.1@121.533,14.668 ; CR4.1 121.581,14.71 122.719,14.71 123.163,15.153 125.023,15.153 127.083,13.093 J8.2
USB_DP: CR4.3 J5.165 J8.3 | length 21
  Top Layer w0.25: J5.165 118.583,14.118 119.933,12.768 CR4.3@121.533,12.768 ; CR4.3 121.539,12.037 125.083,8.493 J8.3
VCC_1V8: C15.1 J5.183 J5.184 J5.185 J5.186 L3.2 R18.1 R21.1 | length 14.8
  Top Layer w0.25: R18.1 13.015,32.35 14.757,30.608 16.732,30.608 19.007,28.333 L3.2 ; C15.1@25.007,28.333 C15.1
  Top Layer w1: L3.2 C15.1@25.007,28.333
VCC_3V3: C2.1 C3.1 C11.1 C17.1 C19.1 C20.1 J5.4 J5.6 J5.39 J5.40 J5.41 J5.42 J5.189 J5.190 J5.191 J5.192 J5.193 J5.194 J5.197 J5.198 J5.199 J5.200 J6.15 J6.15_1 L2.2 R3.1 R4.1 R14.1 U1.2 | length 27.6
  Top Layer w0.25: R14.1@41.622,45.35 42.865,45.35 44.532,43.683 47.082,43.683 49.432,41.333 L2.2 ; J6.15_1 J6.15
  Top Layer w0.254: C2.1@25.505,87.943 C2.1 C2.1@25.905,87.543 ; C3.1 C3.1@28.34,87.6 ; U1.2@31.623,87.6 U1.2
  Top Layer w0.5: R3.1 C2.1@25.505,87.943 ; C2.1@25.905,87.543 C3.1 ; C3.1@28.34,87.6 U1.2@31.623,87.6
  Top Layer w0.8: L2.2 C11.1
VCC_5V: C8.1 CR3.5 CR4.5 J2.2 J3.2 J7.18 J8.1 L1.2 R8.1 | length 27.1
  Top Layer w0.16: CR3.5 100.583,10.043 v1(100.683,9.943)
  Top Layer w0.25: R8.1 12.314,44.45 13.93,42.833 16.889,42.833 19.339,40.383 L1.2 ; C8.1@24.989,40.383 C8.1@25.014,40.358 ; CR4.5 125.358,13.718 126.033,13.043 v1(126.033,8.843)
  Top Layer w0.8: L1.2 C8.1@24.989,40.383
  Bottom Layer w0.25: v1(126.033,8.843) 127.808,8.843 J8.1
pads on no net: CR1.5 CR2.5 CR4.4 CR4.6 J5.2 J5.90 J5.93 J5.94 J5.95 J5.96 J5.99 J5.100 J5.101 J5.102 J5.105 J5.106 J5.107 J5.108 J5.112 J5.114 J5.118 J5.120 J5.124 J5.126 J5.128 J5.130 J5.132 J5.136 J5.138 J5.142 J5.144 J5.148 J5.150 J5.154 J5.156 J5.158 J5.160 J5.162 J5.166 J5.172 J5.174 J5.176 J5.178 J5.179 J5.180 J5.None J7.14 U1.4 U1.5 U1.6 U1.7 U1.8 U1.9 U1.12 U1.14 U1.17 U1.18 U1.19 U1.20 U1.21 U1.22 U1.23 U1.24 U1.26 U1.29 U1.32 U1.33 U1.36 U1.37 U3.3
copper on no net: | length 0.1
  Top Layer w0.254: 29.683,88.993 29.75,88.926 29.783,88.926

## Polygon pours and split planes (outlines as drawn)
no net on Top Solder (solid): 28.933,97.618
no net on Top Layer (solid, pour order 0): -0.067,49.943
GND on Bottom Layer (solid, pour order 2): 1.6,48.4 138.4,48.4 138.4,1.6 1.6,1.6

## Other copper
Top Layer:
  text "Need mounting holes / Could probably tighten everything up" at 59.908,105.093 h1.52

## Silkscreen, mask and mechanical layers (free items; w line width, h text height)
Top Overlay:
  text "ESC" at 1.6,24.358 h1 r90
  text "MTR SW" at 1.6,16.118 h1 r90
  text "BATT" at 1.6,11.434 h1 r90
Top Solder:
  rectangle: 29.983,89.843 50.408,97.418
Mechanical 6:
  circle w1: c3.2,46.8 r1.6
  circle w1: c3.2,3.2 r1.6
  circle w0.013: c136.8,3.2 r1.6
  circle w0.013: c136.8,46.8 r1.6
  circle w1: c136.8,46.8 r1.6
  circle w1: c136.8,3.2 r1.6
  circle w0.013: c3.2,3.2 r1.6
  circle w0.013: c3.2,46.8 r1.6
  lines w0.013: 0,3.2 ccw(c3.2,3.2) 3.2,0 136.8,0 ccw(c136.8,3.2) 140,3.2 140,46.8 ccw(c136.8,46.8) 136.8,50 3.2,50 ccw(c3.2,46.8) 0,46.8 0,3.2
  lines w1: 0,3.2 ccw(c3.2,3.2) 3.2,0 136.8,0 ccw(c136.8,3.2) 140,3.2 140,46.8 ccw(c136.8,46.8) 136.8,50 3.2,50 ccw(c3.2,46.8) 0,46.8 0,3.2

## Text inside footprints (layer, text, board x,y; h text height)
C2: Top Overlay "+" at 26.983,89.265 h0.7 r270
C7: Top Overlay "+" at 7.589,37.408 h0.7
C8: Top Overlay "+" at 24.139,38.758 h0.7 r90
C10: Top Overlay "+" at 36.932,38.408 h0.7
C11: Top Overlay "+" at 53.532,39.733 h0.7 r90
C14: Top Overlay "+" at 7.082,25.008 h0.7
C15: Top Overlay "+" at 23.832,26.758 h0.7 r90
CR1: Mechanical 1 "*" at 108.731,13.489 h0.79 r270
CR2: Mechanical 1 "*" at 105.431,19.089 h0.79 r270
CR3: Mechanical 1 "*" at 102.031,13.489 h0.79 r270
CR4: Mechanical 1 "*" at 122.288,15.166 h0.79
U1: Mechanical 4 "ANTENNA" at 34.454,92.067 h0.7; Mechanical 4 "ANTENNA" at 34.454,92.067 h0.7
U3: Top Overlay "*" at 10.535,15.693 h0.79; Mechanical 1 "*" at 11.488,14.49 h0.79